# Altium PCB PCB_v6.PcbDoc (part 2 of 2)
Units mm, origin at the board's own origin, x right, y up, seen from the top; angles counter-clockwise.
Board outline 150 x 320 mm, 4 copper layers (Top Layer, Vcc, Gnd, Bottom Layer), stack 0.778 mm thick; 181 components, 87 nets, 559 pads, 205 vias.
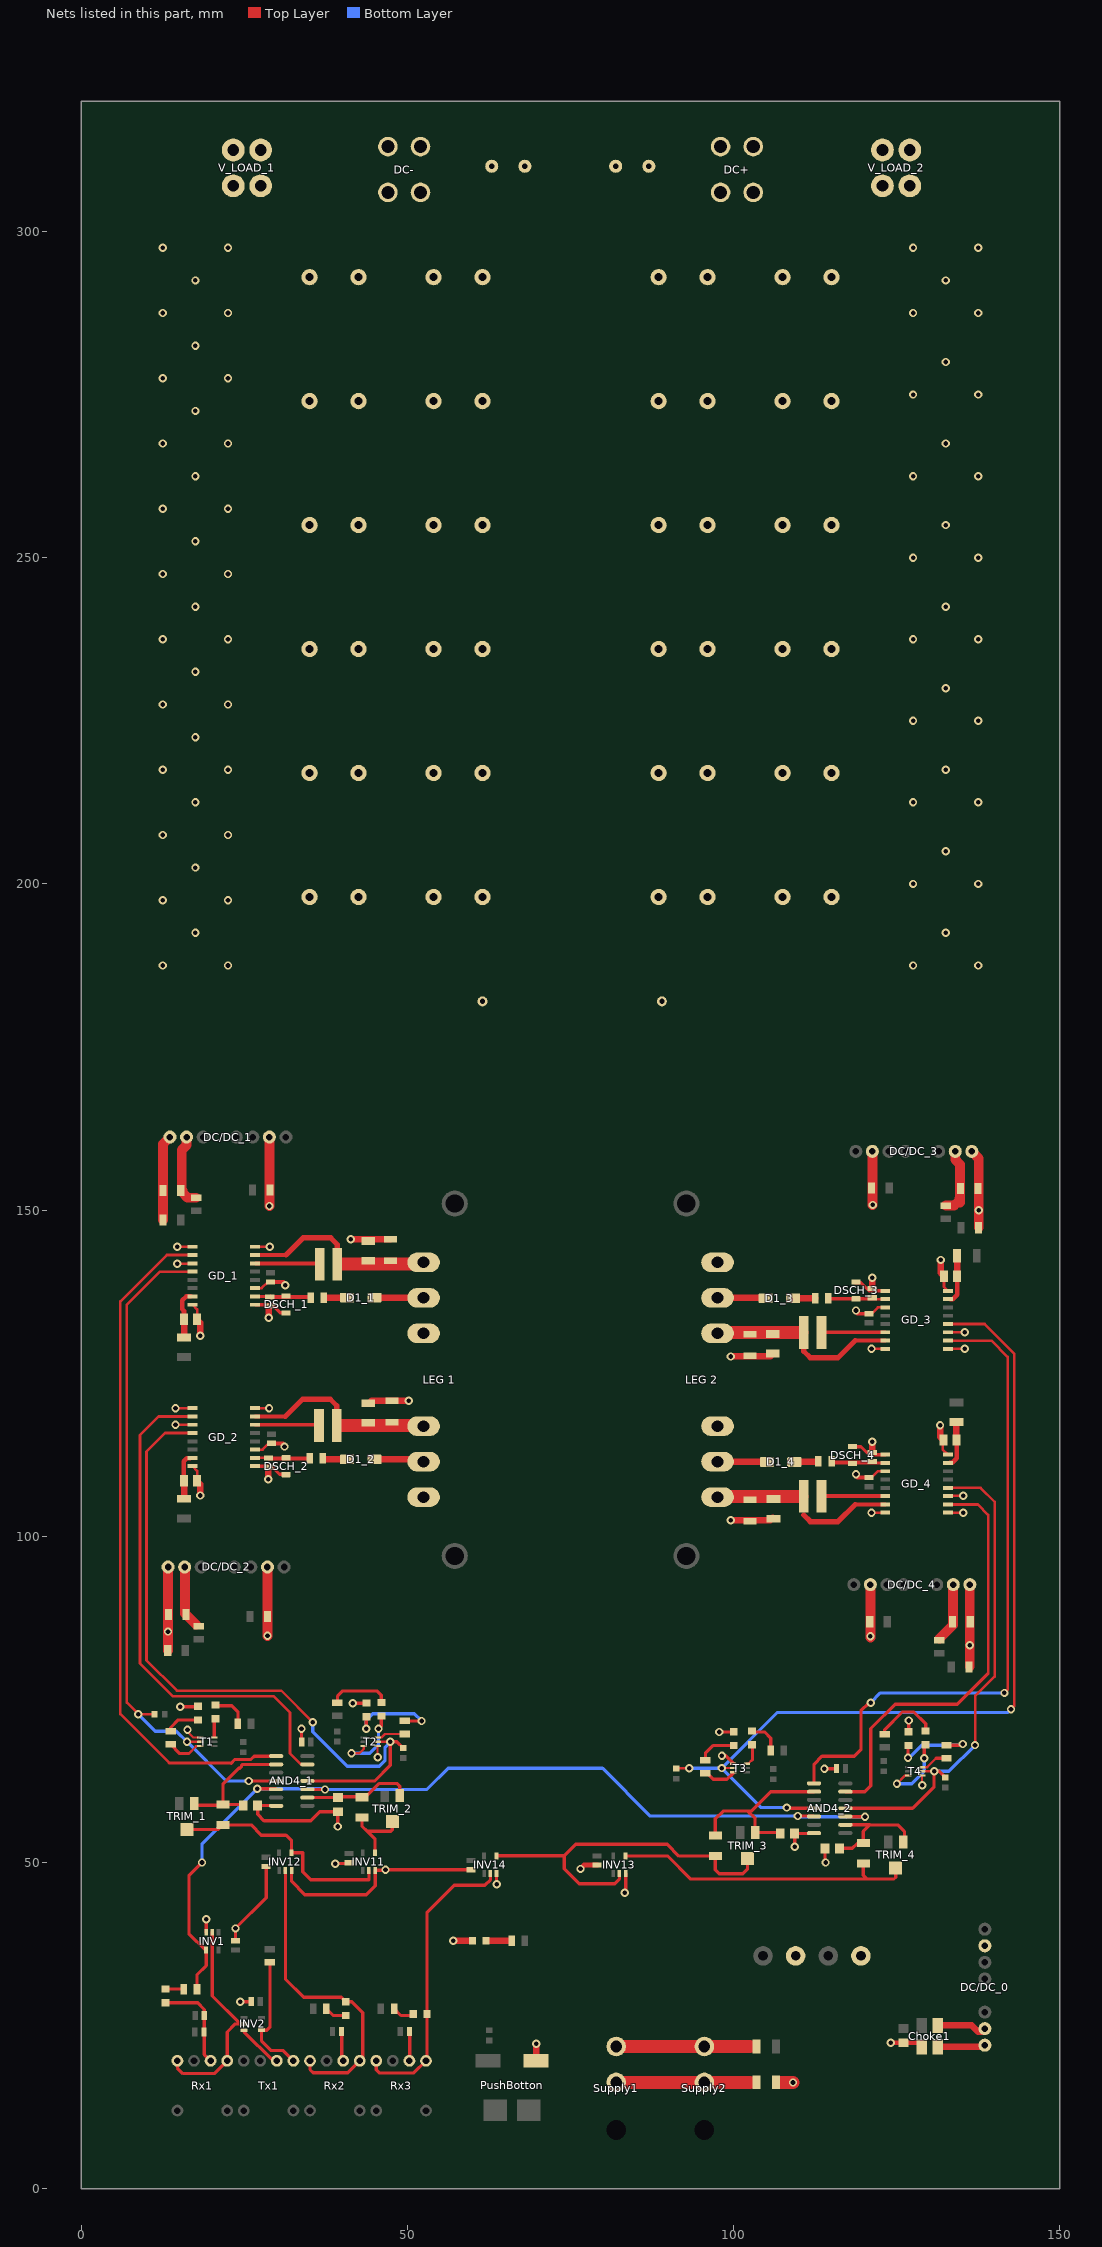
[diagram p4: the nets of this part, all layers, seen from the top]

## Via types
v1: diameter 1.27, hole 0.711, Top Layer to Bottom Layer, 196 vias
v2: diameter 6, hole 3.4, Top Layer to Bottom Layer, 6 vias
v3: diameter 1.3, hole 0.7, Top Layer to Bottom Layer, 2 vias
v4: diameter 1.27, hole 0.711, Top Layer to Bottom Layer, tented top, 1 vias

## Nets (pads, with @x,y where several pads share a name; then routed paths per layer and width w, separated by ;. In a path a pad name is that pad's centre, name@x,y a point inside that pad or via, vN(x,y) a via of type N, cw(c..) or ccw(c..) an arc to the next point about the centre after c; other vN are vias at no path point) (continued)
ADGND_G1: "LEG 1.S1D2" CDC3_1.2 CG2_1.1 CG3_1.1 D1_2.K DC/DC_1.7 DSCH_1.A DZ_1.2 GD_1.1 GD_1.3 GD_1.8 RGS_1.2 V_LOAD_1.1 V_LOAD_1.2 V_LOAD_1.3 V_LOAD_1.4 | length 44.1
  Top Layer w0.4: GD_1.3@26.761,138.035 27.635,138.035 28.6,139 31,139 v1@31.375,138.625 ; GD_1.8@26.761,144.385 v1(28.885,144.385)
  Top Layer w0.5: GD_1.1@26.761,135.495 29.255,135.495 30.483,134.267 DSCH_1.A@31.4,134.267
  Top Layer w0.6: CG2_1.1@29.25,139 31,139 v1@31.375,138.625
  Top Layer w1: v1(28.75,133.5) CG3_1.1@28.75,135.15 ; v1@28.8,150.6 v1(28.84,150.64) ; v1(41.3,145.525) 47.365,145.525 DZ_1.2@47.39,145.55 44.3,145.55 RGS_1.2@44,145.25 ; D1_2.K@44.841,111.838 44.864,111.815 52.379,111.815
  Top Layer w1.5: v1(28.84,150.64) DC/DC_1.7@28.84,161.2
  other v1: 31.25,138.5 12.5,187.5 22.5,187.5 17.5,192.5 12.5,197.5 22.5,197.5 17.5,202.5 12.5,207.5 22.5,207.5 17.5,212.5 12.5,217.5 22.5,217.5 17.5,222.5 12.5,227.5 22.5,227.5 17.5,232.5 12.5,237.5 22.5,237.5 17.5,242.5 12.5,247.5 22.5,247.5 17.5,252.5 12.5,257.5 22.5,257.5 17.5,262.5 12.5,267.5 22.5,267.5 17.5,272.5 12.5,277.5 22.5,277.5 17.5,282.5 12.5,287.5 22.5,287.5 17.5,292.5 12.5,297.5 22.5,297.5
ADGND_G2: "LEG 1.S2" "LEG 2.S4" C_F.1 CDC3_2.2 CDC3_4.2 CE_2.2 CE_4.2 CE_6.2 CE_8.2 CE_10.2 CE_12.2 CE_14.2 CE_16.2 CE_18.2 CE_20.2 CE_22.2 CE_24.2 CG2_2.1 CG2_4.1 CG3_2.1 CG3_4.1 DC-.1 DC-.2 DC/DC_2.7 DC/DC_4.7 DSCH_2.A DSCH_4.A DZ_2.2 DZ_4.2 GD_2.1 GD_2.3 GD_2.8 GD_4.1 GD_4.3 GD_4.8 R_Dis_1.2 RGS_2.2 RGS_4.2 | length 64.6
  Top Layer w0.4: GD_2.3@26.665,113.29 27.79,113.29 28.7,114.2 30.959,114.2 v1@31.279,113.88 ; GD_2.8@26.665,119.64 v1(28.789,119.64) ; v1@118.625,109.375 119,109 121.1,109 122.065,109.965 GD_4.3@123.239,109.965 ; v1(121.115,103.615) GD_4.8@123.239,103.615
  Top Layer w0.5: GD_2.1@26.665,110.75 29.159,110.75 30.387,109.522 DSCH_2.A@31.304,109.522 ; DSCH_4.A@118.6,113.733 119.517,113.733 120.745,112.505 GD_4.1@123.239,112.505
  Top Layer w0.6: CG2_2.1@29.154,114.255 30.904,114.255 v1@31.279,113.88 ; v1@118.625,109.375 119,109 CG2_4.1@120.75,109
  Top Layer w1: v1(28.654,108.755) CG3_2.1@28.654,110.405 ; RGS_2.2@44,120.4 44.15,120.4 44.55,120.8 DZ_2.2@47.6,120.8 v1(50.2,120.8) ; v1(99.55,102.45) 105.57,102.45 RGS_4.2@106,102.88 ; CG3_4.1@121.25,112.85 v1(121.25,114.5)
  Top Layer w1.5: v1(28.54,84.74) DC/DC_2.7@28.54,95.3 ; v1@120.96,84.5 120.96,86.9 DC/DC_4.7@120.96,92.8
  other v1: 120.96,84.7 118.75,109.5 31.154,113.755
ADGND_G3: "LEG 2.S3D4" CDC3_3.2 CG2_3.1 CG3_3.1 D1_4.K DC/DC_3.7 DSCH_3.A DZ_3.2 GD_3.1 GD_3.3 GD_3.8 RGS_3.2 V_LOAD_2.1 V_LOAD_2.2 V_LOAD_2.3 V_LOAD_2.4 | length 38.8
  Top Layer w0.4: v1@118.625,134.495 119.02,134.1 121.1,134.1 122.085,135.085 GD_3.3@123.239,135.085 ; v1(121.115,128.735) GD_3.8@123.239,128.735
  Top Layer w0.5: DSCH_3.A@118.6,138.853 119.517,138.853 120.745,137.625 GD_3.1@123.239,137.625
  Top Layer w0.6: v1@118.625,134.495 119,134.12 CG2_3.1@120.75,134.12
  Top Layer w1: 97.525,111.44 105.04,111.44 D1_4.K@105.063,111.417 ; v1(99.55,127.57) 105.57,127.57 RGS_3.2@106,128 ; CG3_3.1@121.25,137.97 v1(121.25,139.62) ; v1@121.26,150.84 v1(121.3,150.8)
  Top Layer w1.5: v1@121.26,150.8 DC/DC_3.7@121.26,159
  other v1: 118.75,134.62 127.5,187.5 137.5,187.5 132.5,192.5 127.5,200 137.5,200 132.5,205 127.5,212.5 137.5,212.5 132.5,217.5 127.5,225 137.5,225 132.5,230 127.5,237.5 137.5,237.5 132.5,242.5 127.5,250 137.5,250 132.5,255 127.5,262.5 137.5,262.5 132.5,267.5 127.5,275 137.5,275 132.5,280 127.5,287.5 137.5,287.5 132.5,292.5 127.5,297.5 137.5,297.5
CLAMP_1: "LEG 1.G1" DZ_1.1 GD_1.7 RG_1.1 RGS_1.1 | length 29.8
  Top Layer w0.6: GD_1.7@26.761,143.115 31.365,143.115
  Top Layer w0.8: 31.365,143.115 34,145.75 38.25,145.75 39.25,144.75 RG_1.1@39.25,141.732
  Top Layer w1: 52.207,141.732 52.475,142
  Top Layer w2: RG_1.1@39.8,141.732 52.207,141.732
CLAMP_2: "LEG 1.G2" DZ_2.1 GD_2.7 RG_2.1 RGS_2.1 | length 30
  Top Layer w0.6: GD_2.7@26.665,118.37 31.269,118.37
  Top Layer w0.8: 31.269,118.37 33.904,121.005 38.154,121.005 39.154,120.005 RG_2.1@39.154,117
  Top Layer w1: 52.124,117 52.379,117.255
  Top Layer w2: RG_2.1@39.5,117 52.124,117
CLAMP_3: "LEG 2.G3" DZ_3.1 GD_3.7 RG_3.1 RGS_3.1 | length 29.9
  Top Layer w0.6: 118.635,130.005 GD_3.7@123.239,130.005
  Top Layer w0.8: RG_3.1@110.75,131.25 110.75,128.37 111.75,127.37 116,127.37 118.635,130.005
  Top Layer w1: 97.525,131.12 97.655,131.25
  Top Layer w2: 97.655,131.25 RG_3.1@110.5,131.25
CLAMP_4: "LEG 2.G4" DZ_4.1 GD_4.7 RG_4.1 RGS_4.1 | length 27
  Top Layer w0.6: 118.635,104.885 GD_4.7@123.239,104.885
  Top Layer w0.8: 110.75,103.25 111.75,102.25 116,102.25 118.635,104.885
  Top Layer w1: 97.525,106 97.655,106.13
  Top Layer w2: 97.655,106.13 RG_4.1@110.5,106.13
DCLINK_PM: CE_1.2 CE_2.1 CE_3.2 CE_4.1 CE_5.2 CE_6.1 CE_7.2 CE_8.1 CE_9.2 CE_10.1 CE_11.2 CE_12.1 CE_13.2 CE_14.1 CE_15.2 CE_16.1 CE_17.2 CE_18.1 CE_19.2 CE_20.1 CE_21.2 CE_22.1 CE_23.2 CE_24.1 R_Dis_1.1 R_Dis_2.2
DGND: AND4_1.7 AND4_2.7 C90.2 C91.2 C92.2 C93.2 C94.2 C95.2 C96.2 C97.2 C98.2 C99.2 CA1.2 CA2.2 CDC1_1.2 CDC1_2.2 CDC1_3.2 CDC1_4.2 CDC2_1.2 CDC2_2.2 CDC2_3.2 CDC2_4.2 CG1_1.1 CG1_2.1 CG1_3.1 CG1_4.1 CG4_1.2 CG4_2.2 CG4_3.2 CG4_4.2 DC/DC_0.7 DC/DC_1.1 DC/DC_2.1 DC/DC_3.1 DC/DC_4.1 FLT_1.2 FLT_2.2 FLT_3.2 FLT_4.2 GD_1.9 GD_1.11 GD_1.16 GD_2.9 GD_2.11 GD_2.16 GD_3.9 GD_3.11 GD_3.16 GD_4.9 GD_4.11 GD_4.16 INV1.3 INV2.3 INV11.3 INV12.3 INV13.3 INV14.3 LED1.2 LED4.2 PushBotton.1 Rx1.2 Rx2.2 Rx3.2 T1.1 T2.1 T3.1 T4.1 Tx1.2 | length 233.3
  Top Layer w0.35: v1(16.275,70.35) 16.275,70.042 17.166,69.151 T1.1@18.266,69.151 ; v1@45.418,66.134 T2.1@45.418,67.837 ; v1@128.873,61.886 T4.1@128.873,63.324
  Top Layer w0.4: v1(14.453,117.1) GD_2.11@17.05,117.1 ; v1(14.453,119.64) GD_2.9@17.05,119.64 ; v1(14.7,141.8) 17.005,141.8 GD_1.11@17.05,141.845 ; v1(14.7,144.4) 17.035,144.4 GD_1.9@17.05,144.385 ; GD_2.16@17.05,110.75 17.75,110.05 CG1_2.1@17.75,108.5 ; GD_1.16@17.05,135.495 17.75,134.795 CG1_1.1@17.75,133.25 ; CG1_4.1@132.14,114.769 132.044,114.673 132.044,113.315 GD_4.16@132.84,112.519 ; CG1_3.1@132.246,139.87 132.246,138.219 GD_3.16@132.84,137.625 ; GD_4.9@132.84,103.629 132.869,103.6 v1(135.2,103.6) ; GD_4.11@132.84,106.169 132.871,106.2 v1(135.2,106.2) ; GD_3.9@132.84,128.735 v1(135.437,128.735) ; GD_3.11@132.84,131.275 v1(135.437,131.275)
  Top Layer w0.5: LED4.2@12.925,28.505 17.838,28.505 18.866,27.477 C96.2@18.866,26.551 18.866,20.56 Rx1.2@19.821,19.605 ; v1(15.183,73.892) FLT_1.2@17.857,73.892 ; INV1.3@19.141,39.305 v1(19.141,41.3) ; C99.2@23.641,38.005 v1(23.641,39.905) ; v1@23.641,39.932 v1(23.641,39.905) ; v1(24.391,28.671) 26.007,28.671 C98.2@26.041,28.705 ; INV2.3@24.941,24.305 24.941,24.09 Tx1.2@29.427,19.605 ; C91.2@28.341,49.405 28.341,44.605 v1(23.641,39.905) ; Tx1.2@29.641,19.605 Tx1.2@29.981,19.605 Tx1.2@30.201,19.605 ; AND4_1.7@29.826,58.731 CG4_1.2@27.034,58.731 27.034,57.396 28.006,56.424 35.176,56.424 36.531,57.779 CG4_2.2@39.33,57.779 v1@39.33,55.55 ; INV12.3@32.241,48.805 32.241,47.097 34.273,45.065 43.685,45.065 45.06,46.44 INV11.3@45.06,48.805 ; CA1.2@33.716,68.526 33.75,68.56 v1(33.75,70.5) ; v1(38.917,49.834) C92.2@40.898,49.834 ; C90.2@39.941,23.605 39.941,19.805 Rx2.2@40.141,19.605 ; v1(41.6,74.4) 43.25,74.4 43.5,74.65 FLT_2.2@43.7,74.45 ; INV11.3@45.041,48.805 INV11.3@45.06,48.805 ; v1@46.4,48.805 INV11.3@45.06,48.805 ; v1@46.5,48.905 C94.2@59.741,48.905 ; Rx3.2@50.341,19.645 C93.2@50.341,23.605 ; v1@63.641,46.689 INV14.3@63.641,48.305 ; v1@83.441,45.35 INV13.3@83.441,48.305 ; v1(97.8,70) 99.95,70 FLT_3.2@100,70.05 ; v1(98.2,66.35) 98.801,66.35 T3.1@99.923,65.228 ; v1@109.346,52.404 CG4_3.2@109.346,54.453 AND4_2.7@112.262,54.453 ; v1(113.909,64.382) CA2.2@115.718,64.382 ; v1@114.006,50.086 CG4_4.2@114.006,52.174 ; FLT_4.2@126.823,69.924 v1(126.823,71.774)
  Top Layer w0.8: v1(76.525,49.025) 77.105,49.605 C95.2@79.075,49.605
  Top Layer w1: CG1_2.1@17.75,108.5 18.25,108 v1(18.25,106.25) ; CG1_1.1@17.75,133.25 18.25,132.75 v1(18.25,130.75) ; v1(57,38) LED1.2@59.95,38 ; PushBotton.1@69.755,19.665 v1(69.755,22.225) ; v1(131.64,117.019) 131.64,115.269 CG1_4.1@132.14,114.769 ; v1(131.746,142.37) 131.746,140.37 CG1_3.1@132.246,139.87
  Top Layer w1.5: CDC1_1.2@12.55,148.5 CDC2_1.2@12.55,153 12.55,160.15 DC/DC_1.1@13.6,161.2 ; CDC1_2.2@13.3,82.5 DC/DC_2.1@13.3,95.3 ; CDC1_4.2@136.2,80 v1(136.2,83.3) 136.2,86.9 DC/DC_4.1@136.2,92.8 ; DC/DC_3.1@136.5,159 137.55,157.95 CDC1_3.2@137.55,147.3
  other v1: 83.305,45.35 63.68,46.65 46.63,48.875 114.091,50.001 109.35,52.4 39.305,55.525 128.924,61.835 45.425,66.139 13.3,85.4 137.55,150
EDC+: "LEG 1.D1" "LEG 2.D3" C_F.2 CE_1.1 CE_3.1 CE_5.1 CE_7.1 CE_9.1 CE_11.1 CE_13.1 CE_15.1 CE_17.1 CE_19.1 CE_21.1 CE_23.1 D1_1.K D1_3.K DC+.1 DC+.2 R_Dis_2.1 | length 15.1
  Top Layer w1: D1_1.K@44.937,136.583 44.96,136.56 52.475,136.56 ; 97.525,136.56 105.04,136.56 D1_3.K@105.063,136.537
ENABLE: AND4_1.5 AND4_1.10 AND4_2.5 AND4_2.10 INV1.4 RL1.1 | length 145.2
  Top Layer w0.5: RL1.1@17.741,30.605 17.741,32.805 19.141,34.205 INV1.4@19.141,36.605 ; v1(18.5,50) 16.5,48 16.5,39.09 INV1.4@19.063,36.527 ; v1(26.966,61.301) 29.796,61.301 AND4_1.5@29.866,61.231 ; AND4_1.10@34.696,61.201 v1(37.366,61.201) ; v1(109.823,57.124) AND4_2.5@112.253,57.124 ; AND4_2.10@117.123,57.054 117.323,57.054 117.353,57.024 v1(120.123,57.024)
  Bottom Layer w0.5: v1(18.5,50) 18.5,52.835 v1(26.966,61.301) v1@37.266,61.301 ; v1(37.366,61.201) 52.992,61.201 56.241,64.45 79.899,64.45 87.225,57.124 v1(109.823,57.124) ; v1@109.823,57.024 v1(120.123,57.024)
GND_EXT: B2.2 C1.2 Choke1.4 FAN_1.1 FAN_2.1 | length 7.2
  Top Layer w0.7: v3(124.05,22.385) C1.2@126.05,22.385 128.2,22.385 Choke1.4@128.85,21.735
  Top Layer w2: B2.2@107,16.28 v1(109.1,16.28)
IN+_1: AND4_1.1 GD_1.10 | length 104.7
  Top Layer w0.4: 13.498,65.252 6,72.75 6,136 13.115,143.115 GD_1.10@17.05,143.115
  Top Layer w0.5: 13.498,65.252 22.973,65.223 23.545,65.795 25.981,65.795 26.497,66.311 AND4_1.1@29.866,66.311
IN+_2: AND4_1.13 GD_2.10 | length 80
  Top Layer w0.4: GD_2.10@17.05,118.37 11.87,118.37 9,115.5 9,80.5 14,75.5 29.5,75.5 32,73 32,66.75 33.709,65.041 AND4_1.13@34.666,65.041
IN+_3: AND4_2.1 GD_3.10 | length 102
  Top Layer w0.4: GD_3.10@132.84,130.005 139.495,130.005 142,127.5 142,76.5 v1(141.5,76)
  Top Layer w0.5: AND4_2.1@112.323,62.134 112.323,65.073 113.523,66.273 118.503,66.273 119.5,67.27 119.5,73.25 120.75,74.5 v1(121,74.5)
  Bottom Layer w0.5: v1(121,74.5) 122.5,76 v1(141.5,76)
IN+_4: AND4_2.13 GD_4.10 | length 65.6
  Top Layer w0.4: GD_4.10@132.84,104.875 137.425,104.875 139,103.3 139,79
  Top Layer w0.5: AND4_2.13@117.123,60.864 120.075,60.864 121,61.789 121,70.5 121.28,70.78 124.75,74.25 134.25,74.25 139,79
NetAND4_1_2: AND4_1.2 CG4_1.1 DIO_1.2 TRIM_1.c | length 19.2
  Top Layer w0.5: 18.03,58.763 DIO_1.2@21.605,58.763 ; CG4_1.1@24.677,58.888 DIO_1.2@21.73,58.888 21.73,62.065 24.131,64.466 24.277,64.466 24.574,64.763 24.574,64.909 24.706,65.041 AND4_1.2@29.866,65.041
NetAND4_1_9: AND4_1.9 CG4_2.1 DIO_2.2 TRIM_2.c | length 16.6
  Top Layer w0.5: AND4_1.9@34.666,59.961 CG4_2.1@39.312,59.961 ; CG4_2.1@39.53,59.779 39.83,60.079 42.955,60.079 DIO_2.2@43.03,60.004 43.535,60.004 45.632,62.101 48.451,62.101 48.83,61.722 TRIM_2.c@48.83,60.279
NetAND4_2_2: AND4_2.2 CG4_3.1 DIO_3.2 TRIM_3.c | length 27.2
  Top Layer w0.5: DIO_3.2@97.008,54.294 DIO_3.2@97.183,54.119 97.183,56.694 98.383,57.894 102.183,57.894 ; CG4_3.1@107.005,54.594 TRIM_3.c@103.283,54.594 103.283,56.794 102.183,57.894 ; AND4_2.2@112.323,60.864 105.663,60.864 102.693,57.894 102.183,57.894
NetAND4_2_9: AND4_2.9 CG4_4.1 DIO_4.2 TRIM_4.c | length 18.4
  Top Layer w0.5: CG4_4.1@116.206,52.174 118.182,52.174 118.994,52.986 DIO_4.2@119.88,52.986 119.88,54.761 120.88,55.761 125.18,55.761 126.18,54.761 126.18,53.361 TRIM_4.c@125.98,53.161 ; AND4_2.9@117.123,55.784 120.857,55.784 ; AND4_2.9@117.283,55.824 AND4_2.9@117.322,55.785
NetB1_1: B1.1 Supply1.1 Supply2.1 | length 20.5
  Top Layer w2: Supply1.1@82,21.8 Supply2.1@95.5,21.8 102.5,21.8
NetB2_1: B2.1 Supply1.2 Supply2.2 | length 20.5
  Top Layer w2: Supply1.2@82,16.3 Supply2.2@95.5,16.3 102.5,16.3
NetCDC2_1_1: CDC2_1.1 DC/DC_1.2 L1.2 | length 10.9
  Top Layer w1.5: CDC2_1.1@15.4,153.38 15.4,159.2 16.14,159.94 DC/DC_1.2@16.14,161.2 ; CDC2_1.1@15.5,153 15.5,152.7 16.3,151.9 L1.2@17.6,151.9
NetCDC2_2_1: CDC2_2.1 DC/DC_2.2 L2.2 | length 9.5
  Top Layer w1.5: DC/DC_2.2@15.84,95.3 15.84,95.16 15.9,95.1 15.9,88.15 L2.2@17.575,86.475
NetCDC2_3_1: CDC2_3.1 DC/DC_3.2 L3.2 | length 10.9
  Top Layer w1.5: L3.2@132.5,150.7 133.8,150.7 134.6,151.5 134.6,151.8 ; DC/DC_3.2@133.96,159 133.96,157.74 134.7,157 134.7,151.18
NetCDC2_4_1: CDC2_4.1 DC/DC_4.2 L4.2 | length 9.3
  Top Layer w1.5: L4.2@131.55,84.35 133.6,86.4 133.6,86.9 133.6,92.6 133.66,92.66 DC/DC_4.2@133.66,92.8
NetCG1_1_2: CG1_1.2 GD_1.15 RGD3_1.2 | length 6.8
  Top Layer w0.7: CG1_1.2@15.75,133.75 15.75,134.55 15.5,134.8 15.5,136.2 16.065,136.765 GD_1.15@16.765,136.765
  Top Layer w1: RGD3_1.2@15.75,130.5 CG1_1.2@15.75,133.25
NetCG1_2_2: CG1_2.2 GD_2.15 RGD3_2.2 | length 7
  Top Layer w0.7: CG1_2.2@15.75,108.5 15.696,108.554 15.696,111.531 16.154,111.989 GD_2.15@16.739,111.989
  Top Layer w1: RGD3_2.2@15.75,105.75 CG1_2.2@15.75,108.5
NetCG1_3_2: CG1_3.2 GD_3.15 RGD3_3.2 | length 6.4
  Top Layer w0.7: GD_3.15@133.231,136.355 133.566,136.355 134.246,137.035 CG1_3.2@134.246,139.37
  Top Layer w1: CG1_3.2@134.246,139.87 RGD3_3.2@134.246,142.62
NetCG1_4_2: CG1_4.2 GD_4.15 RGD3_4.2 | length 6.9
  Top Layer w0.7: GD_4.15@133.151,111.28 133.505,111.28 134.194,111.969 134.194,114.715 CG1_4.2@134.14,114.769
  Top Layer w1: CG1_4.2@134.14,114.769 RGD3_4.2@134.14,117.519
NetCG3_1_2: CG3_1.2 DSCH_1.K GD_1.2 RGD4_1.1 | length 8.6
  Top Layer w0.4: GD_1.2@26.761,136.765 CG3_1.2@28.964,136.765 ; DSCH_1.K@31.35,136.7 DSCH_1.K@31.4,136.75
  Top Layer w0.5: CG3_1.2@28.964,136.765 CG3_1.2@29.01,136.811
  Top Layer w0.6: CG3_1.2@28.9,136.7 31.35,136.7 RGD4_1.1@35.2,136.7
NetCG3_2_2: CG3_2.2 DSCH_2.K GD_2.2 RGD4_2.1 | length 8.5
  Top Layer w0.4: GD_2.2@26.665,112.02 CG3_2.2@28.868,112.02 ; DSCH_2.K@31.254,111.955 DSCH_2.K@31.304,112.005
  Top Layer w0.5: CG3_2.2@28.868,112.02 CG3_2.2@28.914,112.066
  Top Layer w0.6: CG3_2.2@28.804,111.955 31.254,111.955 RGD4_2.1@35,111.955
NetCG3_3_2: CG3_3.2 DSCH_3.K GD_3.2 RGD4_3.1 | length 8.9
  Top Layer w0.4: DSCH_3.K@118.6,136.37 DSCH_3.K@118.65,136.42 ; CG3_3.2@121.036,136.355 GD_3.2@123.239,136.355
  Top Layer w0.6: RGD4_3.1@114.5,136.42 118.65,136.42 CG3_3.2@121.1,136.42
NetCG3_4_2: CG3_4.2 DSCH_4.K GD_4.2 RGD4_4.1 | length 8.4
  Top Layer w0.4: DSCH_4.K@118.6,111.25 DSCH_4.K@118.65,111.3 ; CG3_4.2@121.036,111.235 GD_4.2@123.239,111.235
  Top Layer w0.6: RGD4_4.1@115,111.3 118.65,111.3 CG3_4.2@121.1,111.3
NetChoke1_2: Choke1.2 DC/DC_0.2 | length 7.7
  Top Layer w1: Choke1.2@131.25,25.035 136.505,25.035 137.5,24.04 DC/DC_0.2@138.5,24.04
NetChoke1_3: Choke1.3 DC/DC_0.1 | length 7.2
  Top Layer w1: Choke1.3@131.25,21.735 DC/DC_0.1@138.5,21.735
NetD1_1_A: D1_1.A RGD4_1.2 | length 3.4
  Top Layer w1: RGD4_1.2@37.317,136.583 D1_1.A@40.737,136.583
NetD1_2_A: D1_2.A RGD4_2.2 | length 3.5
  Top Layer w1: RGD4_2.2@37.2,111.8 D1_2.A@40.737,111.8
NetD1_3_A: D1_3.A RGD4_3.2 | length 3.4
  Top Layer w1: D1_3.A@109.1,136.5 RGD4_3.2@112.5,136.5
NetD1_4_A: D1_4.A RGD4_4.2 | length 3.6
  Top Layer w1: D1_4.A@109.3,111.4 RGD4_4.2@112.9,111.4
NetDIO_3_1: DIO_3.1 INV13.2 INV14.4 TRIM_3.b | length 56.7
  Top Layer w0.5: INV14.4@63.641,51.005 63.686,51.05 74.05,51.05 ; INV13.2@82.491,48.305 82.491,47.471 81.775,46.755 76.345,46.755 74.05,49.05 74.05,51.05 ; TRIM_3.b@102.133,50.594 102.133,49.044 101.383,48.294 97.783,48.294 97.183,48.894 DIO_3.1@97.183,50.994 91.605,50.994 89.8,52.799 75.799,52.799 74.05,51.05
NetFLT_1_1: FLT_1.1 RGD6_1.1 | length 5.3
  Top Layer w0.5: RGD6_1.1@13.716,70.101 13.716,70.701 14.866,71.851 FLT_1.1@17.916,71.851
NetFLT_2_1: FLT_2.1 RGD6_2.1 | length 14.9
  Top Layer w0.5: v1(43.666,70.501) FLT_2.1@43.666,72.151 ; RGD6_2.1@49.566,71.701 v1(52.166,71.701)
  Bottom Layer w0.5: v1(43.666,70.501) 43.666,71.801 44.666,72.801 51.066,72.801 v1(52.166,71.701)
NetFLT_3_1: FLT_3.1 RGD6_3.1 | length 6
  Top Layer w0.5: RGD6_3.1@95.673,65.674 95.673,66.774 96.823,67.924 FLT_3.1@100.073,67.924
NetFLT_4_1: FLT_4.1 RGD6_4.1 | length 13
  Top Layer w0.5: v1(126.723,66.05) FLT_4.1@126.723,67.724 ; RGD6_4.1@132.623,67.974 v1@134.923,67.974
  Bottom Layer w0.5: v1(126.723,66.05) 126.899,66.05 128.823,67.974 v1@134.923,67.974
  other v1: 135.123,68.174
NetGD_1_6: GD_1.6 RG_1.2 | length 9.9
  Top Layer w0.6: GD_1.6@26.761,141.845 RG_1.2@36.55,141.845
  Top Layer w1: RG_1.2@36.55,141.732 RG_1.2@36.55,141.845
NetGD_2_6: GD_2.6 RG_2.2 | length 9.9
  Top Layer w0.6: GD_2.6@26.665,117.1 RG_2.2@36.454,117.1
  Top Layer w1: RG_2.2@36.454,116.987 RG_2.2@36.454,117.1
NetGD_3_6: GD_3.6 RG_3.2 | length 9.9
  Top Layer w0.6: RG_3.2@113.45,131.275 GD_3.6@123.239,131.275
  Top Layer w1: RG_3.2@113.45,131.275 RG_3.2@113.45,131.388
NetGD_4_6: GD_4.6 RG_4.2 | length 9.8
  Top Layer w0.5: RG_4.2@113.45,106.13 RG_4.2@113.489,106.169
  Top Layer w0.6: RG_4.2@113.489,106.169 GD_4.6@123.225,106.169
NetINV1_2: INV1.2 INV2.2 Rx1.1 Rx1.4 | length 33.2
  Top Layer w0.5: Rx1.4@14.741,19.605 14.741,18.5 15.586,17.655 20.411,17.655 Rx1.1@22.361,19.605 22.361,24.024 23.592,25.255 24.378,25.255 ; INV1.2@20.091,39.305 20.091,29.542 24.378,25.255 ; INV2.2@24.941,25.255 24.378,25.255
NetINV2_4: INV2.4 R4.2 Tx1.1 | length 19.2
  Top Layer w0.5: R4.2@28.941,34.731 28.941,24.805 28.441,24.305 INV2.4@27.641,24.305 27.641,22.628 29.096,21.173 30.953,21.173 Tx1.1@32.521,19.605
NetINV12_2: INV12.2 LED_RX1.2 Rx2.1 Rx2.4 | length 48.3
  Top Layer w0.5: INV12.2@31.241,48.755 INV12.2@31.291,48.805 31.291,32.149 34.09,29.35 39.84,29.35 LED_RX1.2@40.59,28.6 ; Rx2.4@35.061,19.605 35.061,18.272 35.563,17.77 40.846,17.77 Rx2.1@42.681,19.605 43.161,20.085 43.161,26.94 ; LED_RX1.2@40.541,28.655 41.455,28.655 43.19,26.92
NetINV14_2: INV14.2 LED_RX2.2 Rx3.1 Rx3.4 | length 45.6
  Top Layer w0.5: Rx3.4@45.221,19.605 45.221,18.217 45.688,17.75 50.986,17.75 Rx3.1@52.841,19.605 53,19.764 53,42.364 57.146,46.51 61.86,46.51 62.741,47.391 INV14.2@62.741,48.355
NetLED1_1: LED1.1 RL0.1 | length 3.9
  Top Layer w1: LED1.1@62.05,38 RL0.1@66,38
NetLED4_1: LED4.1 RL1.2 | length 2.8
  Top Layer w0.5: LED4.1@12.925,30.605 RL1.2@15.741,30.605
NetLED_RX1_1: LED_RX1.1 RL6.2 | length 3.4
  Top Layer w0.5: RL6.2@37.541,27.605 38.591,26.555 LED_RX1.1@40.541,26.555
NetLED_RX2_1: LED_RX2.1 RL7.2 | length 3.4
  Top Layer w0.5: RL7.2@47.941,27.605 48.991,26.555 LED_RX2.1@50.941,26.555
NetRDY_1_1: RDY_1.1 RGD5_1.2 | length 5.5
  Top Layer w0.5: RDY_1.1@20.716,74.051 23.066,74.051 24.016,73.101 RGD5_1.2@24.016,71.301
NetRDY_1_2: RDY_1.2 T1.6 | length 2.8
  Top Layer w0.5: 20.366,69.33 20.366,71.601 RDY_1.2@20.716,71.951
NetRDY_2_1: RDY_2.1 RGD5_2.2 | length 9.6
  Top Layer w0.5: RGD5_2.2@39.266,74.501 39.266,75.466 40.1,76.3 45.3,76.3 45.966,75.634 RDY_2.1@45.966,74.351
NetRDY_2_2: RDY_2.2 T2.6 | length 11.6
  Top Layer w0.35: v1(41.425,66.75) 42.65,66.75 43.316,67.416 T2.6@43.316,67.851
  Top Layer w0.5: v1(45.566,70.501) 45.966,70.901 RDY_2.2@45.966,72.251
  Bottom Layer w0.5: v1(41.425,66.75) 44.215,66.75 45.566,68.101 v1(45.566,70.501)
NetRDY_3_1: RDY_3.1 RGD5_3.2 | length 5.1
  Top Layer w0.5: RDY_3.1@102.873,70.024 104.723,70.024 105.673,69.074 RGD5_3.2@105.673,67.174
NetRDY_3_2: RDY_3.2 T3.6 | length 3.3
  Top Layer w0.35: T3.6@102.023,65.124 102.223,65.124 102.873,65.774
  Top Layer w0.5: 102.873,65.774 RDY_3.2@102.873,67.924
NetRDY_4_1: RDY_4.1 RGD5_4.2 | length 10.1
  Top Layer w0.5: RGD5_4.2@123.123,69.674 123.123,70.373 125.824,73.074 127.623,73.074 129.423,71.274 RDY_4.1@129.423,70.024
NetRDY_4_2: RDY_4.2 T4.6 | length 11
  Top Layer w0.35: v1(125.023,62.074) 126.273,63.324 T4.6@126.773,63.324
  Top Layer w0.5: v1(129.223,65.974) RDY_4.2@129.223,67.724
  Bottom Layer w0.5: v1(125.023,62.074) 127.323,62.074 129.223,63.974 v1(129.223,65.974)
NetRGD6_1_2: RGD6_1.2 T1.3 | length 5.6
  Top Layer w0.35: 16.52,66.701 17.566,67.747 ; 17.566,67.851 T1.3@18.266,67.851
  Top Layer w0.5: RGD6_1.2@13.716,68.101 15.116,66.701 16.52,66.701
NetRGD6_2_2: RGD6_2.2 T2.3 | length 4.4
  Top Layer w0.35: T2.3@45.416,69.151 46.016,69.151 46.566,69.701 RGD6_2.2@49.566,69.701
NetRGD6_3_2: RGD6_3.2 T3.3 | length 5
  Top Layer w0.5: RGD6_3.2@95.673,63.674 95.973,63.674 96.873,62.774 98.977,62.774 T3.3@99.923,63.72
NetRGD6_4_2: RGD6_4.2 T4.3 | length 4.3
  Top Layer w0.35: T4.3@128.873,64.624 129.673,64.624 131.023,65.974
  Top Layer w0.5: 131.023,65.974 RGD6_4.2@132.623,65.974
PWM_G1: DIO_1.1 INV11.2 INV12.4 TRIM_1.b | length 35.9
  Top Layer w0.5: TRIM_1.b@16.18,55.063 21.03,55.063 DIO_1.1@21.73,55.763 26.036,55.763 27.6,54.199 31.4,54.199 32.241,53.358 INV12.4@32.241,51.505 33.941,51.505 33.941,48.605 35.191,47.355 44.091,47.355 INV11.2@44.091,48.805
PWM_G2: DIO_2.1 INV11.4 TRIM_2.b | length 11.4
  Top Layer w0.5: DIO_2.1@43.03,56.879 43.03,55.579 43.83,54.779 ; INV11.4@45.041,51.505 45.041,53.568 43.83,54.779 ; TRIM_2.b@47.68,56.279 47.68,55.029 47.43,54.779 43.83,54.779
PWM_G4: DIO_4.1 INV13.4 TRIM_4.b | length 46.7
  Top Layer w0.5: INV13.4@83.441,51.005 89.894,51.005 93.438,47.461 120.48,47.461 ; DIO_4.1@119.88,49.861 119.88,48.061 120.48,47.461 ; 124.58,47.461 120.48,47.461 ; 124.83,47.711 TRIM_4.b@124.83,49.161
RDY_1: AND4_1.4 GD_1.12 RGD1_1.2 T1.2 | length 105.1
  Top Layer w0.35: v1(16.216,68.501) T1.2@18.266,68.501
  Top Layer w0.4: RGD1_1.2@11.225,72.75 v1(8.75,72.75) 7,74.5 7,135.5 12.075,140.575 GD_1.12@17.05,140.575
  Top Layer w0.5: v1(25.666,62.501) AND4_1.4@29.866,62.501
  Bottom Layer w0.5: v1@9.073,72.427 11.36,70.14 14.566,70.14 16.205,68.501 v1(16.216,68.501) 22.216,62.501 v1(25.666,62.501)
RDY_2: AND4_1.11 GD_2.12 RGD1_2.2 T2.2 | length 109.6
  Top Layer w0.35: T2.2@45.416,68.501 v1(47.366,68.501)
  Top Layer w0.4: GD_2.12@17.05,115.83 12.83,115.83 10,113 10,81 14.654,76.346 30.654,76.346 v1(35.5,71.5)
  Top Layer w0.5: AND4_1.11@34.666,62.501 44.966,62.501 47.366,64.901 v1(47.366,68.501) 48.391,68.501 RGD1_2.2@49.391,67.501
  Bottom Layer w0.5: v1(35.5,71.5) 35.5,70.025 40.75,64.775 45.672,64.775 46.564,65.667 46.564,67.699 v1(47.366,68.501)
RDY_3: AND4_2.4 GD_3.12 RGD1_3.2 T3.2 | length 140.1
  Top Layer w0.35: v1(98.173,64.474) T3.2@99.923,64.474
  Top Layer w0.4: RGD1_3.2@91.225,64.425 93.15,64.425 v1(93.175,64.45) ; GD_3.12@132.84,132.545 138.455,132.545 143,128 143,74 v1(142.5,73.5)
  Top Layer w0.5: v1@108.223,58.324 AND4_2.4@112.323,58.324
  Bottom Layer w0.5: v1(93.175,64.45) 98.197,64.45 v1(98.173,64.474) ; v1(108.123,58.424) 104.223,58.424 v1(98.173,64.474) ; v1(142.5,73.5) 142,73 106.699,73 v1(98.173,64.474)
RDY_4: AND4_2.11 GD_4.12 RGD1_4.2 T4.2 | length 75.8
  Top Layer w0.35: T4.2@128.873,63.974 v1(130.723,63.974)
  Top Layer w0.4: GD_4.12@132.84,107.439 137.861,107.439 140,105.3 140,78.5 137,75.5 v1(137,68)
  Top Layer w0.5: AND4_2.11@117.123,58.324 127.423,58.324 130.723,61.624 v1(130.723,63.974) 131.498,63.974 RGD1_4.2@132.423,63.049
  Bottom Layer w0.5: v1(130.723,63.974) 132.974,63.974 v1(137,68)
pads on no net: "LEG 1." "LEG 2." AND4_1.6 AND4_1.8 AND4_2.6 AND4_2.8 D1_1.0 D1_2.0 D1_3.0 D1_4.0 DC/DC_0.3 DC/DC_0.5 DC/DC_0.8 DC/DC_1.3 DC/DC_1.5 DC/DC_1.8 DC/DC_2.3 DC/DC_2.5 DC/DC_2.8 DC/DC_3.3 DC/DC_3.5 DC/DC_3.8 DC/DC_4.3 DC/DC_4.5 DC/DC_4.8 DSCH_1.0 DSCH_2.0 DSCH_3.0 DSCH_4.0 GD_1.4 GD_2.4 GD_3.4 GD_4.4 INV1.1 INV2.1 INV11.1 INV12.1 INV13.1 INV14.1 PushBotton. Rx1.5 Rx1.8 Rx2.5 Rx2.8 Rx3.5 Rx3.8 Supply1. Supply2. T1.0 T2.0 T3.0 T4.0 TRIM_1.a TRIM_2.a TRIM_3.a TRIM_4.a Tx1.3 Tx1.4 Tx1.5 Tx1.8
copper on no net:
  other v2: 5,5 145,5 5,170 145,170 5,315 145,315

## Polygon pours and split planes (outlines as drawn)
EDC+ on Vcc "PWR_DC+" (solid, pour order 84): 30,190 30,175 46.9,158.1 59.9,158.1 64.2,153.8 64.2,147.8 64.2,135 86.1,135 86.1,154.1 90.1,158.1 103.1,158.1 120,175 120,190
EDC+ on Vcc "PWR_DC+" (solid, pour order 55): 30,293 30,190 120,190 120,293.25 112.25,301 106,307.25 106,313.875 105,314.875 89.875,314.875 86.3,311.3 86.3,306.901 83.399,304 60.5,304 57.5,301 38,301
+5VCC on Vcc "+5Vcc" (solid, pour order 68): 5,155 5,20 20,5 70,5 71.5,6.5 71.5,30 74.982,33.482 95,33.482 96.518,35 96.518,42.518 100,46 124,46 136.518,33.482 143.482,33.482 145,35 145,45 145,155 137.5,162.5 133.412,162.5 131,160.088 131,81 127.5,77.5 48.412,77.5 22.5,77.5 19,81 19,160 16.5,162.5 12.5,162.5
+15V_G3 on Vcc "+15V_G3" (solid, pour order 60): 116.7,161.796 118.9,163.996 122.504,163.996 124.5,162 124.5,130 123.323,128.823 118.377,128.823 116.7,130.5
+15V_G4 on Vcc "+15V_G4" (solid, pour order 58): 116.6,114.1 118.5,116 124.5,116 124.5,102.2 124.5,85 123,83.5 117.251,83.5 116.6,84.108
+15V_G2 on Vcc "+15V_G2" (solid, pour order 47): 25.5,84.5 26.5,83.5 33.5,83.5 34.53,84.53 34.53,115.97 33.48,117.02 26.52,117.02 25.5,116 25.5,103.2
+15V_G1 on Vcc "+15V_G1" (solid, pour order 57): 27.018,155.67 33.33,155.67 34.7,154.3 34.7,140.7 33.08,139.08 26.92,139.08 25.5,140.5 25.5,154
+12V_EXT on Vcc "+12V_EXT_L02_P104" (solid, pour order 104): 142.364,27.636 145,25 145,20 130,5 105,5 102.5,7.5 102.5,38.5 104,40 122.594,40 134.957,27.636
NetB2_1 on Vcc "GND_iso" (solid, pour order 108): 77.5,7.5 80,5 97.5,5 100,7.5 100,14.8 97,17.8 80,17.8 77.5,15.3
NetB1_1 on Vcc "12V_iso" (solid, pour order 110): 77.5,19.5 78.2,18.8 99.3,18.8 100,19.5 100,25 97.5,27.5 80,27.5 77.5,25
EDC+ on Gnd "PWR_DC+" (solid, pour order 98): 112,198 114,196 118,196 120,198 120,293 118,295 114,295 112,293
EDC+ on Gnd "PWR_DC+" (solid, pour order 96): 38,293 36,295 32,295 30,293 30,198 32,196 36,196 38,198
ADGND_G2 on Gnd "Top Layer-No Net" (solid, pour order 56): 110.523,115.375 86.2,115.375 86.2,120.275 86.125,120.35 86.175,120.3 106.95,120.3
ADGND_G2 on Gnd "PWR_DC-" (solid, pour order 81): 85,83.5 122,83.5 124.5,86 124.5,118.668 111.368,118.668 107.947,122.089 96.411,122.089 91.861,126.639 85.65,126.639 85.65,118 105.997,118 105.997,102.858 98.8,102.858 98.8,95 85,95
ADGND_G2 on Gnd "PWR_DC-" (solid, pour order 83): 45,315 44,314 44,305 58.3,290.7 58.3,191.7 64,186 64,131.85 54,121.85 54,119.75 56.1,119.75 64,111.85 64,83.5 86,83.5 86,114.8 92.3,121.1 92.3,126.2 86,132.5 86,154.428 91.6,159.406 91.6,293.4 80,305 68,305 63.42,309.58 63.42,311.58 60,315
ADGND_G2 on Gnd "PWR_DC-" (solid, remove dead copper, pour order 82): 25.5,83.5 65.011,83.5 65.011,95 52.011,108 42.8,108 42.8,115.346 50.521,119.8 55.5,119.8 55.5,122.1 25.5,122.1
DGND on Gnd "DGND" (solid, pour order 69): 5,155 5,20 20,5 70,5 71.5,6.5 71.5,21.498 71.5,30.125 74.857,33.482 94.982,33.482 96.5,35 96.5,42.5 100,46 124,46 136.518,33.482 143.482,33.482 145,35 145,45 145,155 137.5,162.5 133.412,162.5 131.002,160.09 131.002,81 127.502,77.5 21.5,77.5 19,80 19,160 16.499,162.501 12.5,162.5
NetB2_1 on Gnd "GND_iso" (solid, pour order 100): 77.5,7.5 80,5 97.5,5 100,7.5 100,14.8 97,17.8 80,17.8 77.5,15.3
NetB1_1 on Gnd "12V_iso" (solid, pour order 102): 77.5,19.5 78.2,18.8 99.3,18.8 100,19.5 100,25 97.5,27.5 80,27.5 77.5,25
GND_EXT on Gnd "GND_Ext" (solid, pour order 106): 142.5,27.5 145,25 145,20 130,5 105,5 102.5,7.5 102.5,25 102.5,38.5 104,40 122.5,40 135,27.5
ADGND_G3 on Top Layer "Top Layer-No Net" (solid, pour order 50): 90.443,144.346 95.6,144.392 97.523,145.92 105.35,145.92 108.12,145.92 102.675,140.475 87.275,140.475 87.275,143.5 88.1,144.325
ADGND_G1 on Top Layer "PWR_LOAD1" (solid, pour order 65): 62.3,110 69.1,110 72.5,113.4 72.5,166.25 52.75,186 34,186 22,198 10,198 10,184 27,167 34.5,167 43.5,158 57.2,158 62,153.2 62,132 52.55,132 52.55,127.55 62.3,117.8
ADGND_G3 on Top Layer "PWR_LOAD2" (solid, pour order 66): 87.8,109.95 83,109.95 77.55,115.4 77.55,166.6 86.95,176 106,176 125,195 140,195 140,182.5 122,164.5 120,164.5 120,157.85 102.825,140.625 87.8,140.625 87.8,133.25 92.75,128.3 107.2,128.3 107.2,126.175 104.725,123.7 94.473,123.7 87.8,117.629
DCLINK_PM on Top Layer "PWR_DCLink_PM" (solid, pour order 67): 39.3,296.3 44,301 59,301 67,309 67,312 70,315 80,315 83,312 83,309 91,301 106,301 110.7,296.3 110.7,194.7 107.25,191.25 42.5,191.25 39.3,194.45
ADGND_G1 on Top Layer "PWR_LOAD1" (solid, pour order 86): 10,300 20,310 20,314 21,315 29,315 30,314 30,302 25,297 25,185 10,185
ADGND_G3 on Top Layer "PWR_LOAD1" (solid, pour order 88): 121,315 129,315 130,314 130,310 140,300 140,185 125,185 125,297 120,302 120,314
ADGND_G3 on Bottom Layer "Top Layer-No Net" (solid, pour order 48): 90.443,144.346 95.6,144.392 100.424,148.225 108.2,148.225 108.2,140.475 87.275,140.475 87.275,146.55 89.488,144.337
ADGND_G1 on Bottom Layer "PWR_LOAD1" (solid, remove dead copper, pour order 63): 25.5,149.91 50.273,149.91 50.273,152.9 54.423,157.05 57.413,157.05 60.05,157.05 64.2,152.9 64.2,149.4 72.5,149.4 72.5,166.25 52.75,186 34,186 25,195 10,195 10,184 27,167 32,167 35.5,163.5 35.5,159.459 31.541,155.5 26,155.5 25.5,155
ADGND_G3 on Bottom Layer "PWR_LOAD2" (solid, remove dead copper, pour order 61): 124.5,142.675 101.575,142.675 99.819,144.431 99.819,153.931 97.825,155.925 87.825,155.925 87.825,142.675 77.625,142.675 77.625,166.625 87,176 106,176 127.5,197.5 140,197.5 140,182.5 133.3,175.8 122,164.5 119,164.5 119,155 124.5,149.5
ADGND_G3 on Bottom Layer "PWR_LOAD2" (solid, remove dead copper, pour order 62): 124.5,117.775 116.425,109.7 83.325,109.7 77.575,115.45 77.575,158.075 85.85,158.075 85.85,148.075 87.825,146.1 87.825,131.2 90.575,128.45 104.05,128.45 107.238,131.637 107.237,141.812 100.975,148.075 124.5,148.075
ADGND_G1 on Bottom Layer "PWR_LOAD1" (solid, remove dead copper, pour order 64): 25.5,128.9 28,126.4 52.694,126.4 62.3,116.794 62.3,110 69.094,110 72.5,113.406 72.5,153 64.2,153 64.2,146.4 62.3,144.5 62.3,133.8 61,132.5 42.7,132.5 42.7,142 50.273,149.573 50.273,153 25.5,153
ADGND_G2 on Bottom Layer "PWR_DC-" (solid, pour order 49): 45,314.95 44.012,313.963 44.012,304.988 58.3,290.7 58.3,195.475 62.525,191.25 87.538,191.25 91.6,195.312 91.6,300.4 87.012,304.988 67.988,304.988 63.975,309 63.975,310.975 60,314.95
ADGND_G1 on Bottom Layer "PWR_LOAD1" (solid, pour order 92): 10,300 20,310 20,314 21,315 29,315 30,314 30,302 25,297 25,185 10,185
ADGND_G3 on Bottom Layer "PWR_LOAD1" (solid, pour order 94): 120,314 121,315 129,315 130,314 130,310 140,300 140,187.5 125,187.5 125,297 120,302
NetB2_1 on Bottom Layer "GND_iso" (solid, pour order 112): 77.5,7.5 80,5 97.5,5 100,7.5 100,14.8 97,17.8 80,17.8 77.5,15.3
NetB1_1 on Bottom Layer "12V_iso" (solid, pour order 114): 77.5,19.5 78.2,18.8 99.3,18.8 100,19.5 100,25 97.5,27.5 80,27.5 77.5,25

## Keep-outs
Keep-Out Layer:
  lines w0.2: 0,0 0,319.949 149.98,319.949 149.98,0 0,0 ; 47.9,108.14 56.95,108.14 56.95,109.24 47.9,109.24 47.9,108.14 ; 47.9,113.58 47.9,114.68 56.95,114.68 56.95,113.58 47.9,113.58 ; 47.9,133.26 47.9,134.36 56.95,134.36 56.95,133.26 47.9,133.26 ; 47.9,138.7 47.9,139.8 56.95,139.8 56.95,138.7 47.9,138.7 ; 92.95,108.1 92.95,109.2 102,109.2 102,108.1 92.95,108.1 ; 92.95,113.58 92.95,114.68 102,114.68 102,113.58 92.95,113.58 ; 92.95,133.26 92.95,134.36 102,134.36 102,133.26 92.95,133.26 ; 92.95,138.7 92.95,139.8 102,139.8 102,138.7 92.95,138.7

## Other copper
Top Layer:
  region net ADGND_G1: 62.76,134.505 60.254,131.324 63.023,129.142 65.529,132.324
  rectangle net ADGND_G1: 52.55,127.72 64.16,132.6
  rectangle net ADGND_G1: 51.96,110 64.035,112.96
  region net ADGND_G1: 61.635,110.77 64.714,113.851 63.075,115.49 59.995,112.409
  rectangle net ADGND_G3: 86.285,109.95 98.36,112.91
Vcc:
  region net EDC+: 64.25,138.975 63.181,137.853 64.05,137.025 65.119,138.147
  rectangle net EDC+: 52.275,134.965 64.275,138.075
  region net EDC+: 97.625,138.075 85.825,138.075 85.825,134.975 97.625,134.975
  region net EDC+: 84.586,138.666 86.27,137.062 87.097,137.931 85.414,139.534
Gnd:
  rectangle net ADGND_G2: 42.1,102.902 64.7,107.615
Bottom Layer:
  rectangle net ADGND_G1: 42.025,127.525 63.525,132.65
  region net ADGND_G1: 62.76,134.505 60.254,131.324 63.023,129.142 65.529,132.324
  region net ADGND_G1: 61.735,110.745 64.814,113.826 63.175,115.465 60.095,112.384
  rectangle net ADGND_G1: 52.06,110.035 64.135,112.935
  region net ADGND_G1: 44.68,132.565 41.499,135.071 39.317,132.302 42.499,129.796
  rectangle net ADGND_G3: 87.175,109.725 109.1,112.91
  region net ADGND_G3: 106.985,115.53 104.479,112.349 107.248,110.167 109.754,113.349
  region net ADGND_G3: 84.562,112.587 87.744,110.081 89.925,112.85 86.743,115.356

## Silkscreen, mask and mechanical layers (free items; w line width, h text height)
Top Overlay:
  drawing of 9141 lines, arcs and shapes, not listed
  text "H-Bridge SiC  v2.1" at 66.143,59.858 h3
  text "Project: Corfo 17COTE-72557" at 66.143,57.738 h2
  text "Design: David Arancibia" at 66.143,55.803 h2
  text "Guide: Félix Rojas" at 66.143,53.868 h2
  text "+12V" at 103.5,40 h1.5
  text "GND" at 108.5,40 h1.5
  text "+12V" at 113.5,40 h1.5
  text "GND" at 118.5,40 h1.5
  text "+12V" at 84,21.5 h1.5
  text "+12V" at 97.5,21.5 h1.5
  text "GND" at 84,16 h1.5
  text "GND" at 97.5,16 h1.5
  text "Reset" at 60,3 h2
  text "Enable_In" at 15.5,2 h2
  text "Enable_Out" at 25,2 h2
  text "Gate_1" at 36.5,2 h2
  text "Gate_2" at 45.98,2 h2

## Text inside footprints (layer, text, board x,y; h text height)
DC/DC_0: Top Overlay "NC" at 142.41,40.28 h1 r180; Top Overlay "-Vout" at 144.01,37.74 h1 r180; Top Overlay "+Vout" at 144.01,35.2 h1 r180; Top Overlay "NC" at 142.41,32.66 h1 r180; Top Overlay "Ctrl" at 143.41,27.5 h1 r180; Top Overlay "+Vin" at 143.61,25.04 h1 r180; Top Overlay "-Vin" at 143.61,22.5 h1 r180
DC/DC_1: Top Overlay "-Vin" at 14.1,156.09 h1 r90; Top Overlay "+Vin" at 16.64,156.09 h1 r90; Top Overlay "Ctrl" at 19.1,156.29 h1 r90; Top Overlay "NC" at 24.26,157.29 h1 r90; Top Overlay "+Vout" at 26.8,155.69 h1 r90; Top Overlay "-Vout" at 29.34,155.69 h1 r90; Top Overlay "NC" at 31.88,157.29 h1 r90
DC/DC_2: Top Overlay "NC" at 31.58,91.39 h1 r90; Top Overlay "-Vout" at 29.04,89.79 h1 r90; Top Overlay "+Vout" at 26.5,89.79 h1 r90; Top Overlay "NC" at 23.96,91.39 h1 r90; Top Overlay "Ctrl" at 18.8,90.39 h1 r90; Top Overlay "+Vin" at 16.34,90.19 h1 r90; Top Overlay "-Vin" at 13.8,90.19 h1 r90
DC/DC_3: Top Overlay "-Vin" at 136,164.11 h1 r270; Top Overlay "+Vin" at 133.46,164.11 h1 r270; Top Overlay "Ctrl" at 131,163.91 h1 r270; Top Overlay "NC" at 125.84,162.91 h1 r270; Top Overlay "+Vout" at 123.3,164.51 h1 r270; Top Overlay "-Vout" at 120.76,164.51 h1 r270; Top Overlay "NC" at 118.22,162.91 h1 r270
DC/DC_4: Top Overlay "NC" at 117.92,96.51 h1 r270; Top Overlay "-Vout" at 120.46,98.11 h1 r270; Top Overlay "+Vout" at 123,98.11 h1 r270; Top Overlay "NC" at 125.54,96.51 h1 r270; Top Overlay "Ctrl" at 130.7,97.51 h1 r270; Top Overlay "+Vin" at 133.16,97.71 h1 r270; Top Overlay "-Vin" at 135.7,97.71 h1 r270
DIO_1: Top Overlay "+" at 19.52,58.593 h1
DIO_2: Top Overlay "+" at 40.82,59.709 h1
DIO_3: Top Overlay "+" at 94.973,53.824 h1
DIO_4: Top Overlay "+" at 117.67,52.691 h1
DZ_1: Top Overlay "+" at 49.2,143.1 h1
DZ_2: Top Overlay "+" at 49.3,118 h1
DZ_3: Top Overlay "+" at 100.8,130.2 h1 r180
DZ_4: Top Overlay "+" at 100.8,105.2 h1 r180
"LEG 1": Top Overlay "M2" at 46.4,107.4 h1.52 r270; Top Overlay "M1" at 46.1,132.4 h1.52 r270
"LEG 2": Top Overlay "M3" at 103.8,140.8 h1.52 r90; Top Overlay "M4" at 104,115.5 h1.52 r90
Rx1: Top Overlay "Rx" at 20.181,18.195 h2 r180
Rx2: Top Overlay "Rx" at 40.501,18.195 h2 r180
Rx3: Top Overlay "Rx" at 50.661,18.195 h2 r180
Tx1: Top Overlay "Tx" at 30.341,18.195 h2 r180